# Altium PCB 1.0.PcbDoc
Units mil, origin at the board's own origin, x right, y up, seen from the top; angles counter-clockwise.
Board outline 6000 x 4000 mil, 2 copper layers (Top Layer, Bottom Layer); 56 components, 61 nets, 276 pads, 0 vias.
Unrouted connection lines stored in the file: 147.
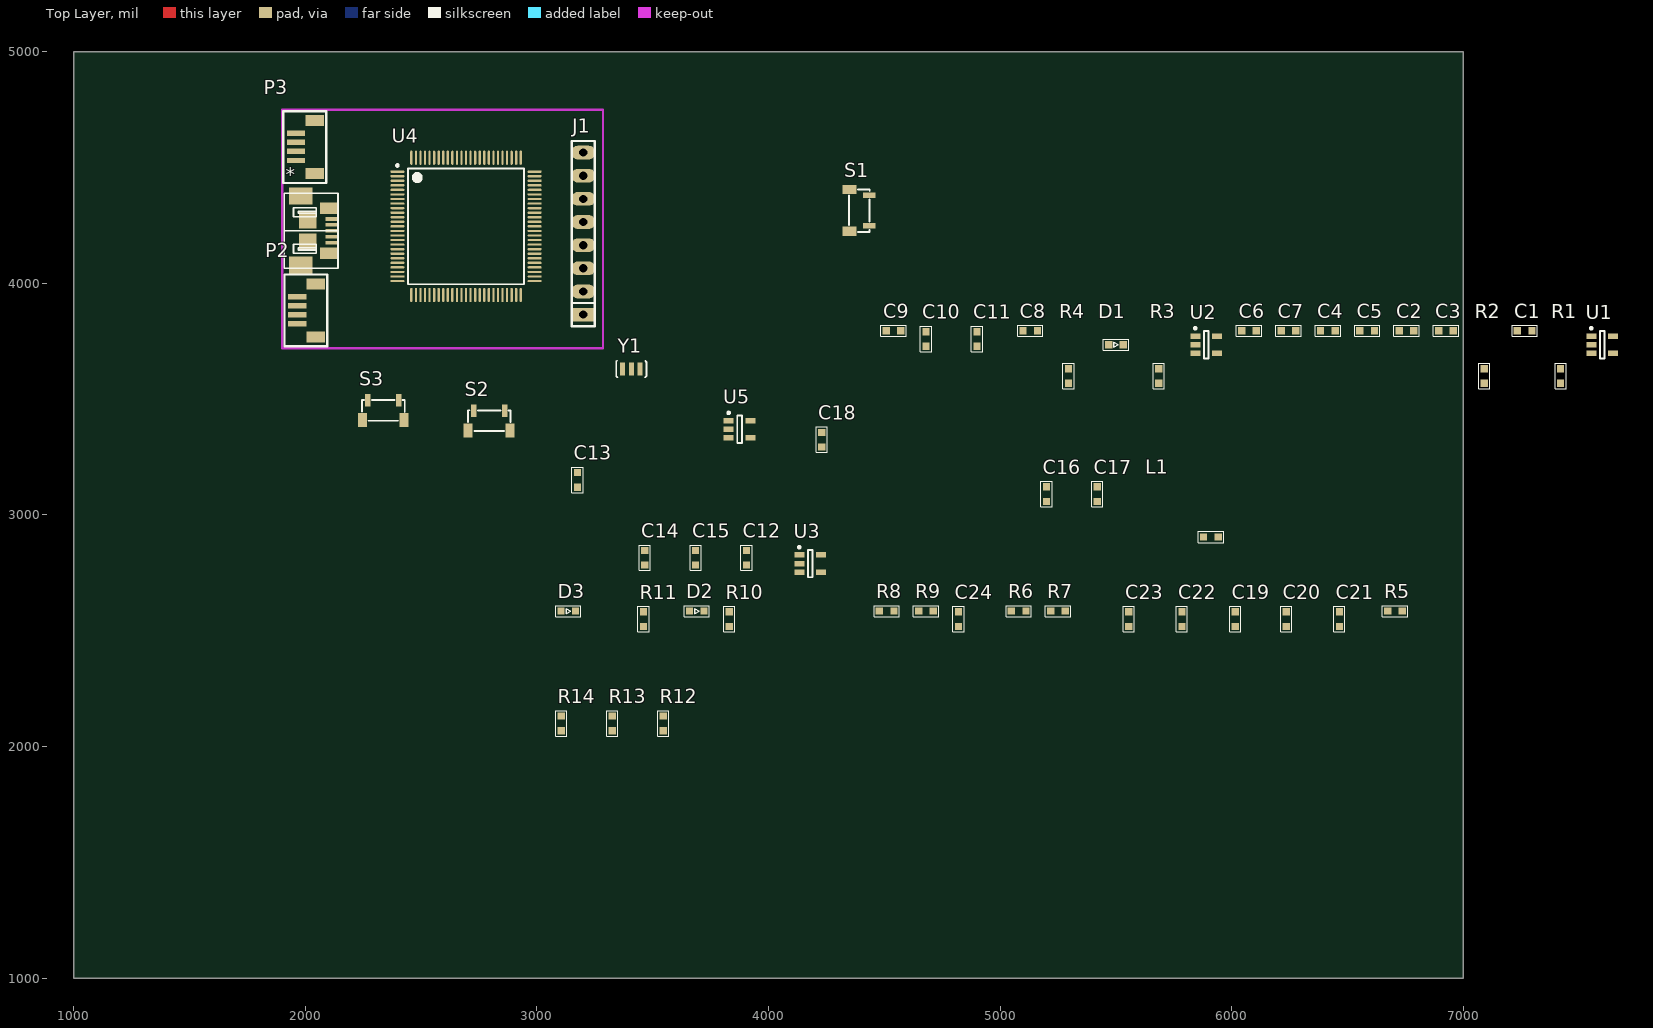
[diagram p0: Top Layer view]
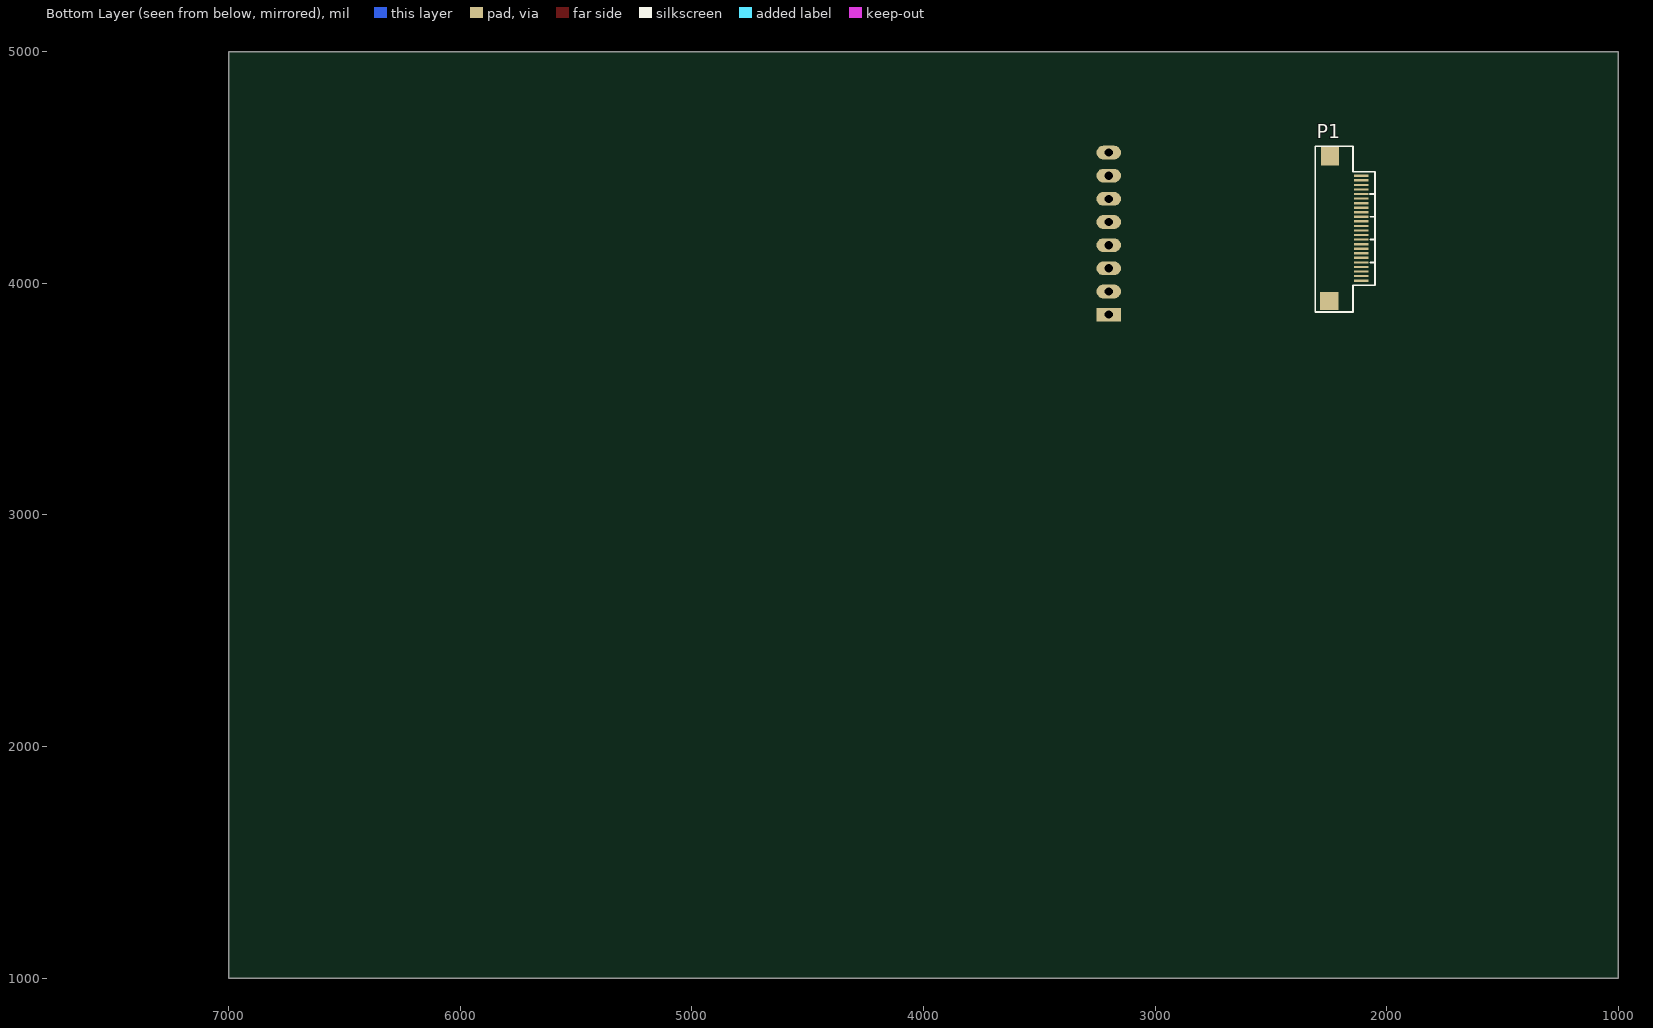
[diagram p1: Bottom Layer view, seen from below]

## Layer stack, top to bottom
Top Solder: solder mask 0.4, Solder Resist, Dk 3.5
Top Layer: signal copper 1.4
Dielectric 1: dielectric 12.6, FR-4, Dk 4.8
Bottom Layer: signal copper 1.4
Bottom Solder: solder mask 0.4, Solder Resist, Dk 3.5

## Board outline
1000,1000 7000,1000 7000,5000 1000,5000

## Design rules (kind name [scope] priority, off if disabled: settings)
Clearance [All] p1: gap=8 ignorepadtopadclearanceinfootprint=FALSE except(0: Arc-Hole Track-Hole SMDPad-Hole THPad-Hole Via-Hole Fill-Hole Poly-Hole Region-Hole Text-Hole; 10: Arc-Text Track-Text SMDPad-Text THPad-Text Via-Text Fill-Text Poly-Text Region-Text Text-Text)
PolygonConnect [All] p1: connectstyle=Relief reliefconductorwidth=10 reliefentries=4 polygonreliefangle="90 Angle" airgapwidth=10
RoutingVias [All] p1: holewidth=28 width=50 viastyle="Through Hole" minholewidth=28 minwidth=50 maxholewidth=28 maxwidth=50
SolderMaskExpansion [All] p1: expansion=4
Width [All] p1: maxlimit=10 minlimit=10 preferedwidth=10
30 further rules are at their usual default settings.

## Classes and differential pairs
component class ov7670电路（骑飞）: C1 C2 C3 C4 C5 C6 C7 C8 C9 C10 C11 C12 C13 C14 C15 D1 P1 R1 R2 R3 R4 U1 U2 U3
component class F407VET6（主控）: * C16 C17 C18 C19 C20 C21 C22 C23 C24 D2 D3 J1 L1 P2 P3 R5 R6 R7 R8 R9 R10 R11 R12 R13 R14 S1 S2 S3 U4 U5 Y1

## Components (designator, comment, footprint, x,y, rotation, side; value= is the part's Value field where it differs from the comment)
* "USB-Micro" USB-Micro 2062.5,4227.5 r270 top
C1 "CAP" C_0603 7265,3795 r0 top
C2 "10UF" C_0603 6755,3795 r0 top
C3 "1UF" C_0603 6925,3795 r0 top
C4 "10nF" C_0603 6415,3795 r0 top
C5 "10UF" C_0603 6585,3795 r0 top
C6 "4.7uF" C_0603 6075,3795 r0 top
C7 "4.7uF" C_0603 6245,3795 r0 top
C8 "1UF" C_0603 5130,3795 r0 top
C9 "10nF" C_0603 4540,3795 r0 top
C10 "10UF" C_0603 4680,3760 r90 top
C11 "0.1UF" C_0603 4900,3760 r90 top
C12 "1UF" C_0603 3905,2815 r90 top
C13 "10nF" C_0603 3175,3151.5 r90 top
C14 "10UF" C_0603 3465,2815 r90 top
C15 "0.1UF" C_0603 3685,2815 r90 top
C16 "CAP" C_0603 5200,3090 r90 top
C17 "CAP" C_0603 5420,3090 r90 top
C18 "1UF" C_0603 4230,3325 r90 top
C19 "10nF" C_0603 6015,2550 r90 top
C20 "10UF" C_0603 6235,2550 r90 top
C21 "0.1UF" C_0603 6465,2550 r90 top
C22 "CAP" C_0603 5785,2550 r90 top
C23 "CAP" C_0603 5555,2550 r90 top
C24 "CAP" C_0603 4820,2550 r90 top
D1 "LED" LED_0603 5500,3735 r0 top value=BLUE
D2 "LED" LED_0603 3690,2585 r0 top value=BLUE
D3 "LED" LED_0603 3135,2585 r0 top value=BLUE
J1 "CON8" sip-8 3200,3865 r90 top
L1 "L" L-0603 5910,2905 r0 top
P1 "FPC" FPC0.5-40P-A 2109.56,4396.94 r90 bottom
P2 "Header 4" HDR4*1_SH1.0 1895,4028.11 r270 top
P3 "Header 4" HDR4*1_SH1.0 1890,4733.74 r270 top
R1 "10" R_0603 7420,3600 r90 top
R2 "10" R_0603 7090,3600 r90 top
R3 "1K" R_0603 5685,3600 r90 top
R4 "10" R_0603 5295,3600 r90 top
R5 "RES" R_0603 6705,2585 r0 top
R6 "RES" R_0603 5080,2585 r0 top
R7 "RES" R_0603 5250,2585 r0 top
R8 "RES" R_0603 4510,2585 r0 top
R9 "RES" R_0603 4680,2585 r0 top
R10 "RES" R_0603 3830,2550 r90 top
R11 "RES" R_0603 3460,2550 r90 top
R12 "RES" R_0603 3545,2100 r90 top
R13 "RES" R_0603 3325,2100 r90 top
R14 "RES" R_0603 3105,2100 r90 top
S1 "SW-PB" Switch-PB-C-M 4435,4248 r90 top
S2 "SW-PB" Switch-PB-C-M 2860,3450 r180 top
S3 "SW-PB" Switch-PB-C-M 2403,3495 r180 top
U1 "PAM3101" SOT23-5 7600,3735 r0 top
U2 "PAM3101" SOT23-5 5890,3735 r0 top
U3 "PAM3101" SOT23-5 4180,2790 r0 top
U4 "STM32F407VET6" STM-LQFP100_L 2693.74,4246.26 r0 top
U5 "PAM3101" SOT23-5 3875,3370 r0 top
Y1 "XTAL-3PIN" X-CPX20 3407.6,3630 r0 top

## Footprints (in the part's own frame and the unit in brackets; to place one, negate y for a bottom-side part, rotate by r counter-clockwise, add the part's x,y. Pads: shape width x height; smd on the part's side, far side on the other; paste and mask are expansions set on the pad)
C_0603 [mm]
  rect 0.8x0.8 smd: 1(-0.8,0) 2(0.8,0)
  silkscreen extent -1.38,-0.61 1.4,0.61, body extent -0.79,-0.38 0.81,0.42, height 0.5
FPC0.5-40P-A [mm] "FPC0.5mm接口"
  rect 0.25x1.6 smd: 1(-9.78,0.011) 2(-9.28,0.011) 3(-8.78,0.011) 4(-8.28,0.011) 5(-7.78,0.011) 6(-7.28,0.011) 7(-6.78,0.011) 8(-6.28,0.011) 9(-5.78,0.011) 10(-5.28,0.011) 11(-4.78,0.011) 12(-4.28,0.011) 13(-3.78,0.011) 14(-3.28,0.011) 15(-2.78,0.011) 16(-2.28,0.011) 17(-1.78,0.011) 18(-1.28,0.011) 19(-0.78,0.011) 20(-0.28,0.011) 21(0.22,0.011) 22(0.72,0.011) 23(1.22,0.011) 24(1.72,0.011)
  rect 2x2 smd: A(-12.029,3.5) B(3.871,3.44)
  silkscreen extent -13.21,-1.52 4.96,5.04
HDR4*1_SH1.0 [mm]
  rect 1.2x2 smd: 0(0.762,3.81) 0(6.604,3.81)
  rect 0.6x2 smd: 1(2.159,1.778) 2(3.159,1.778) 3(4.159,1.778) 4(5.159,1.778)
  silkscreen extent -0.25,0.38 7.62,5.08
L-0603 [mm]
  rect 0.8x0.8 smd: 1(-0.8,0) 2(0.8,0)
  silkscreen extent -1.38,-0.61 1.4,0.61, body extent -0.79,-0.48 0.81,0.47, height 0.78
LED_0603 [mm]
  rect 0.8x0.8 smd: 1(-0.8,0) 2(0.8,0)
  silkscreen extent -1.38,-0.6 1.39,0.61, body extent -0.8,-0.4 0.82,0.4, height 0.6
R_0603 [mm]
  rect 0.8x0.8 smd: 1(-0.8,0) 2(0.8,0)
  silkscreen extent -1.38,-0.61 1.4,0.61, body extent -0.81,-0.42 0.83,0.43, height 0.46
sip-8 [mm]
  rect 1.5x2.7 hole 0.9: 1(0,0)
  oval 1.5x2.7 hole 0.9: 2(2.54,0) 3(5.08,0) 4(7.62,0) 5(10.16,0) 6(12.7,0) 7(15.24,0) 8(17.78,0)
  silkscreen extent -1.27,-1.27 19.05,1.27
SOT23-5 [mm] "Max4173"
  rect 1.1x0.6 smd: 1(-1.2,0.95) 2(-1.2,0) 3(-1.2,-0.95) 4(1.2,-0.95) 5(1.2,0.95)
  silkscreen extent -1.32,-1.5 0.25,1.92, body extent -1.4,-1.45 1.4,1.45, height 1.2
STM-LQFP100_L [mm] "Thin QFP, 100-Leads, Body 14x14mm, Pitch 0.5mm, IPC High Density"
  oval 1.55x0.25 smd: 1(-7.525,6) 2(-7.525,5.5) 3(-7.525,5) 4(-7.525,4.5) 5(-7.525,4) 6(-7.525,3.5) 7(-7.525,3) 8(-7.525,2.5) 9(-7.525,2) 10(-7.525,1.5) 11(-7.525,1) 12(-7.525,0.5) 13(-7.525,0) 14(-7.525,-0.5) 15(-7.525,-1) 16(-7.525,-1.5) 17(-7.525,-2) 18(-7.525,-2.5) 19(-7.525,-3) 20(-7.525,-3.5) 21(-7.525,-4) 22(-7.525,-4.5) 23(-7.525,-5) 24(-7.525,-5.5) 25(-7.525,-6) 51(7.525,-6) 52(7.525,-5.5) 53(7.525,-5) 54(7.525,-4.5) 55(7.525,-4) 56(7.525,-3.5) 57(7.525,-3) 58(7.525,-2.5) 59(7.525,-2) 60(7.525,-1.5) 61(7.525,-1) 62(7.525,-0.5) 63(7.525,0) 64(7.525,0.5) 65(7.525,1) 66(7.525,1.5) 67(7.525,2) 68(7.525,2.5) 69(7.525,3) 70(7.525,3.5) 71(7.525,4) 72(7.525,4.5) 73(7.525,5) 74(7.525,5.5) 75(7.525,6)
  oval 0.25x1.55 smd: 26(-6,-7.525) 27(-5.5,-7.525) 28(-5,-7.525) 29(-4.5,-7.525) 30(-4,-7.525) 31(-3.5,-7.525) 32(-3,-7.525) 33(-2.5,-7.525) 34(-2,-7.525) 35(-1.5,-7.525) 36(-1,-7.525) 37(-0.5,-7.525) 38(0,-7.525) 39(0.5,-7.525) 40(1,-7.525) 41(1.5,-7.525) 42(2,-7.525) 43(2.5,-7.525) 44(3,-7.525) 45(3.5,-7.525) 46(4,-7.525) 47(4.5,-7.525) 48(5,-7.525) 49(5.5,-7.525) 50(6,-7.525) 76(6,7.525) 77(5.5,7.525) 78(5,7.525) 79(4.5,7.525) 80(4,7.525) 81(3.5,7.525) 82(3,7.525) 83(2.5,7.525) 84(2,7.525) 85(1.5,7.525) 86(1,7.525) 87(0.5,7.525) 88(0,7.525) 89(-0.5,7.525) 90(-1,7.525) 91(-1.5,7.525) 92(-2,7.525) 93(-2.5,7.525) 94(-3,7.525) 95(-3.5,7.525) 96(-4,7.525) 97(-4.5,7.525) 98(-5,7.525) 99(-5.5,7.525) 100(-6,7.525)
  silkscreen extent -7.65,-6.35 6.35,6.8, body extent -7,-7 7,7, height 1.6
Switch-PB-C-M [mil]
  rect 39.37x60 smd: 0(-23,85) 0(157,85)
  rect 23.62x55.12 smd: 1(0,0) 2(133,0)
  silkscreen extent -26,-2 158,88
USB-Micro [mil]
  rect 74.8x100 smd: 0(-149.5,-82.5) 0(149.5,-82.5)
  rect 49.21x78.74 smd: 0(-96.5,39.5) 0(97.5,39.5)
  rect 74.8x74.8 smd: 0(-47.5,-52.5) 0(48.5,-52.5)
  rect 15.75x55.12 smd: 1(-50.5,52.5) 2(-25,52.5) 3(0.5,52.5) 4(26,52.5) 5(51.5,52.5)
  silkscreen extent -163,-154 163,79, body extent -161,-154 161,79, height 109
X-CPX20 [mm] "贴片晶振"
  rect 0.55x1.45 smd: 1(-0.95,0) 2(0,0) 3(0.95,0)
  silkscreen extent -1.65,-0.89 1.65,0.91

## Part data
C2 C3 C4 C5 C6 C7 C8 C9 C10 C11 C12 C13 C14 C15 C18 C19 C20 C21: library part CAP
J1: "Connector"
P1: library part FPC-40P, "FPC排线连接器"
P2 P3: "接插件", LatestRevisionDate=17-Jul-2002, LatestRevisionNote="Re-released for DXP Platform.", Publisher="Altium Limited"
R1 R2 R3 R4: library part RES
S1 S2 S3: "Switch"
U1 U2 U3 U5: "LDO"
U4: "ARM Cortex-M4 32-bit MCU+FPU, 210 DMIPS, 512 kB Flash, 192 kB Internal RAM, 82 I/Os, 100-pin LQFP, -40 to 85 degC, Tray", I/Os (High Current)=82, Manufacturer=STMicroelectronics, Operating Frequency(F) (Processor speed) (MHz)=168, Supplier Part Number 1=497-12075-ND, Supply Voltage(Vcc) max (V)=3.6, Supply Voltage(Vcc) min (V)=1.8, ComponentLink1Description="Manufacturer URL", ComponentLink1URL=http://www.st.com/web/en/home.html, ComponentLink2Description=Datasheet, ComponentLink2URL=http://www.st.com/st-web-ui/static/active/en/resource/technical/document/datasheet/DM00037051.pdf, ComponentLink3Description="Package Specification", ComponentLink3URL=http://www.st.com/st-web-ui/static/active/en/resource/technical/document/data_brief/DM00071938.pdf, Core="ARM Cortex-M4", D/A Converter=2x12-bit, DatasheetVersion="Rev. 4", FLASH Size (Prog) (kB)=512, Internal RAM Size (kB)=192, Mounting Technology="Surface Mount", PackageDescription="100-Pin Low Profile Quad Flat Package, 14 x 14 mm Body, 0.5 mm Pitch", PackageReference=LQFP100, PackageVersion="Rev. 1, 06/2013", Packing=Tray, PartNumber=STM32F407VET6, Supplier 1=Digi-Key, Supplier 2=Farnell, Supplier 3=Newark, Supplier 4=Mouser, Supplier Part Number 2=2064367, Supplier Part Number 3=73T2332, Supplier Part Number 4=511-STM32F407VET6
Y1: "贴片晶振"
D1 D2 D3: PCB DECAL=LED_0603

## Nets (pads, with @x,y where several pads share a name; then routed paths per layer and width w, separated by ;. In a path a pad name is that pad's centre, name@x,y a point inside that pad or via, vN(x,y) a via of type N, cw(c..) or ccw(c..) an arc to the next point about the centre after c; other vN are vias at no path point)
1.8V: C10.2 C11.2 P1.10 U2.5
3.3V: C20.2 C21.2 J1.8 L1.2 P2.4 R5.1 R6.1 R8.1 R10.1 R11.1 U4.6 U4.11 U4.19 U4.28 U4.50 U4.75 U4.100 U5.5
3V3: C2.2 C3.2 C8.2 C14.2 C15.2 R3.2 U1.1 U1.3 U2.1 U2.3 U3.5
5V: *.1 C12.2 C18.2 P3.2 R12.2 U3.1 U3.3 U5.1 U5.3
AGND: C1.1 P1.2 R4.1
AVDD(2.45~3.0V): C1.2 P1.4 R1.2
BOOT0: R6.2 R7.1 U4.94
BOOT1: R8.2 R9.1 U4.37
DCMI_D0: P1.24 U4.63
DCMI_D1: P1.23 U4.64
DCMI_D2: P1.19 U4.65
DCMI_D3: P1.21 U4.98
DCMI_D4: P1.22 U4.79
DCMI_D5: P1.20 U4.92
DCMI_D6: P1.18 U4.4
DCMI_D7: P1.16 U4.5
DCMI_D8: P1.14
DCMI_D9: P1.12
DCMI_HREF: P1.9 U4.29
DCMI_PCLK: P1.17 U4.31
DCMI_VSYNC: P1.7 U4.93
DCMI_XCLK: P1.13 U4.67
DOVDD(1.7~3.0V): C6.2 C7.2 P1.11 R2.1
GND: *.5 C2.1 C3.1 C4.1 C5.1 C6.1 C7.1 C8.1 C9.1 C10.1 C11.1 C12.1 C13.1 C14.1 C15.1 C16.1 C17.1 C18.1 C19.1 C20.1 C21.1 C22.1 C23.1 C24.2 D1.2 J1.7 P1.15 P2.1 P3.1 R4.2 R7.2 R9.2 S1.2 S2.2 S3.2 U1.2 U2.2 U3.2 U4.10 U4.20 U4.27 U4.74 U4.99 U5.2 Y1.2
KEY1: S2.1 U4.55
KEY2: S3.1 U4.56
LED1: D2.2
LED2: D3.2
NC: P1.1
Net*_2: *.2 R14.2
Net*_3: *.3 R12.1 R13.2
NetC4_2: C4.2 U1.4
NetC5_2: C5.2 R1.1 R2.2 U1.5
NetC9_2: C9.2 U2.4
NetC13_2: C13.2 U3.4
NetC19_2: C19.2 U5.4
NetC23_2: C23.2 U4.49
NetC24_1: C24.1 U4.73
NetD1_1: D1.1 R3.1
NetD2_1: D2.1 R10.2
NetD3_1: D3.1 R11.2
NRST: C22.2 R5.2 S1.1 U4.14
OS_8M_IN: U4.12 Y1.3
OS_8M_OUT: U4.13 Y1.1
PWDN: P1.8 U4.18
RESET: P1.6 U4.17
SIOC: P1.5 U4.16
SIOD: P1.3 U4.15
SPI1_CS: J1.4 U4.77
SPI1_MISO: J1.2 U4.32 U4.90
SPI1_MOSI: J1.1
SPI1_REST: J1.6 U4.40
SPI1_RS: J1.5 U4.39
SPI1_SCK: J1.3 U4.30
SWCLK: P2.3 U4.76
SWDIO: P2.2 U4.72
USART1-RX: P3.4 U4.68
USART1-TX: P3.3 U4.69
USB_D+: R13.1 U4.71
USB_D-: R14.1 U4.70
VDDA: C16.2 C17.2 L1.1 U4.21 U4.22
pads on no net: *.0 *.4 P1.A P1.B P2.0 P3.0 S1.0 S2.0 S3.0 U4.1 U4.2 U4.3 U4.7 U4.8 U4.9 U4.23 U4.24 U4.25 U4.26 U4.33 U4.34 U4.35 U4.36 U4.38 U4.41 U4.42 U4.43 U4.44 U4.45 U4.46 U4.47 U4.48 U4.51 U4.52 U4.53 U4.54 U4.57 U4.58 U4.59 U4.60 U4.61 U4.62 U4.66 U4.78 U4.80 U4.81 U4.82 U4.83 U4.84 U4.85 U4.86 U4.87 U4.88 U4.89 U4.91 U4.95 U4.96 U4.97

## Keep-outs
Top Layer:
  lines w10: 1900,3720 3285,3720 3285,4750 1900,4750 1900,3720